# EAGLE board 13255-SparkFun_Cypress_USBUART_BOB-panel.v10 (EAGLE 7.5.0), part 1 of 6
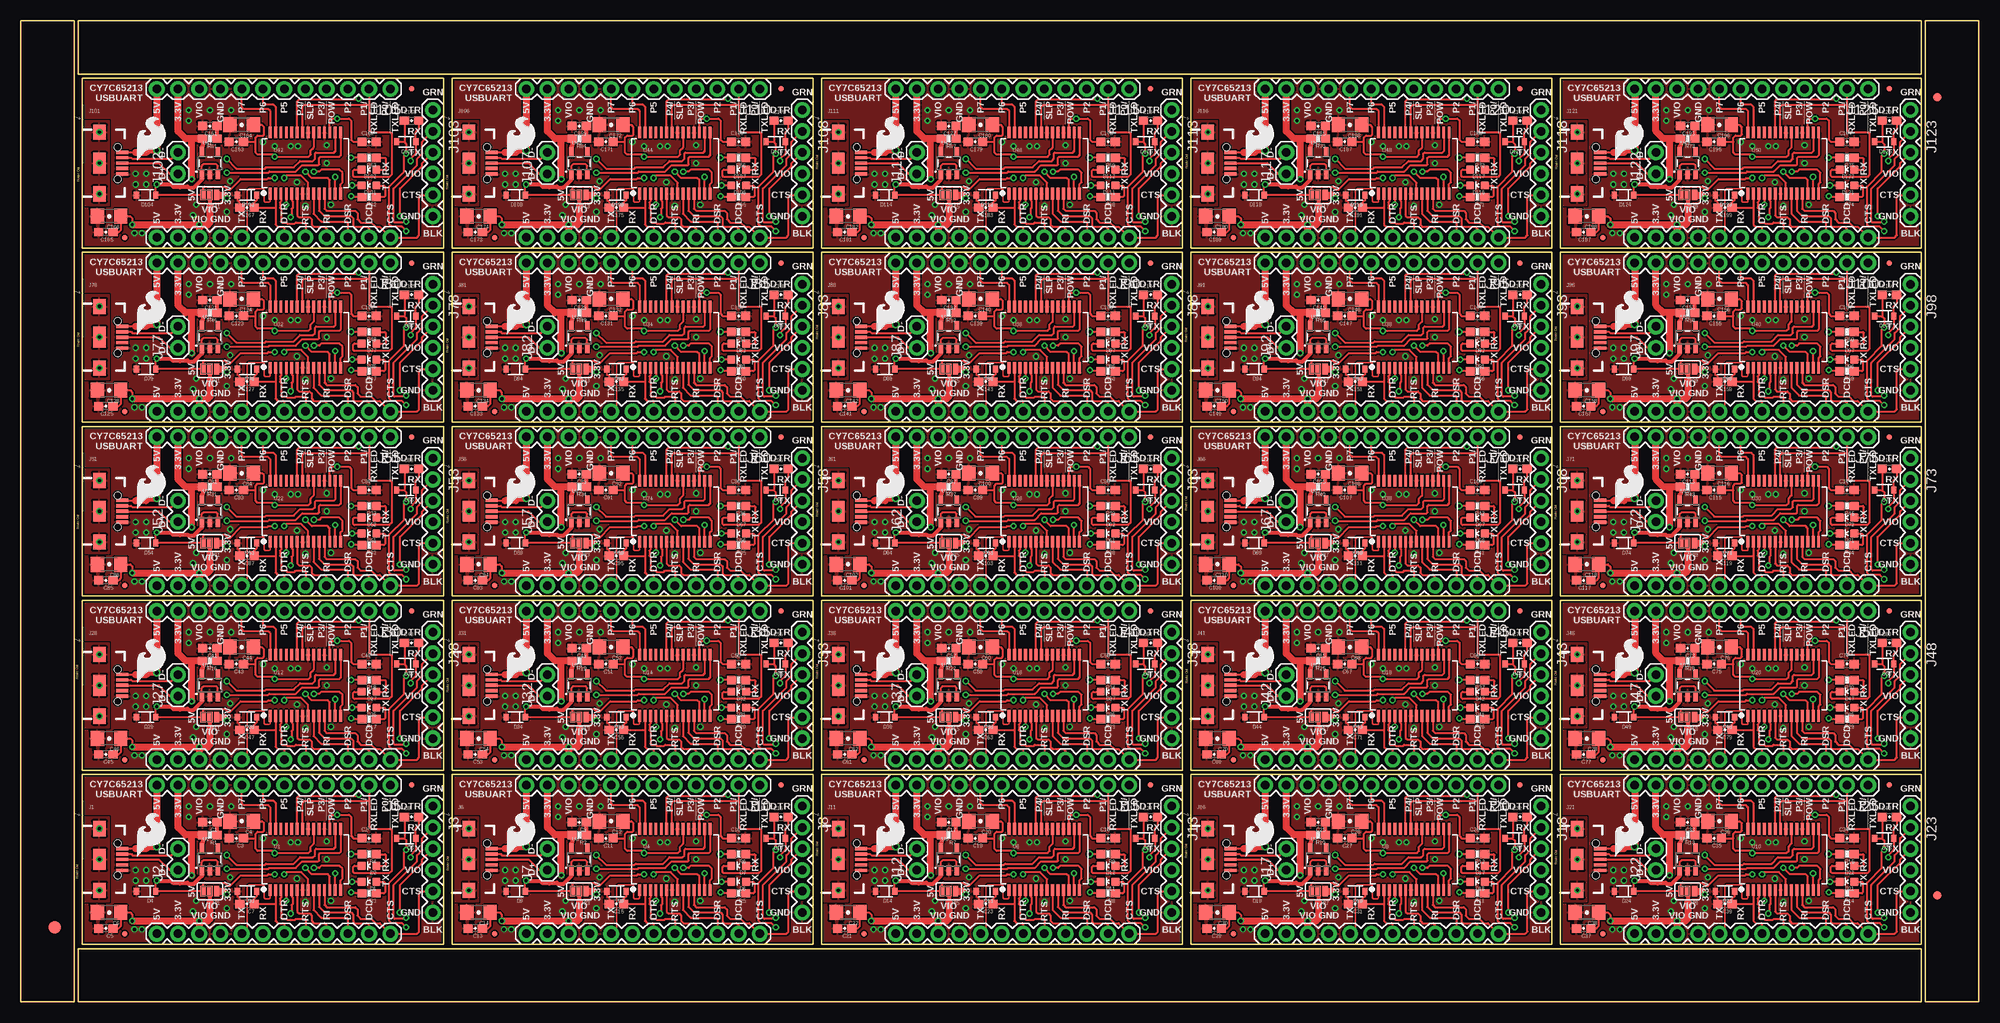
[diagram p0: board, top side]
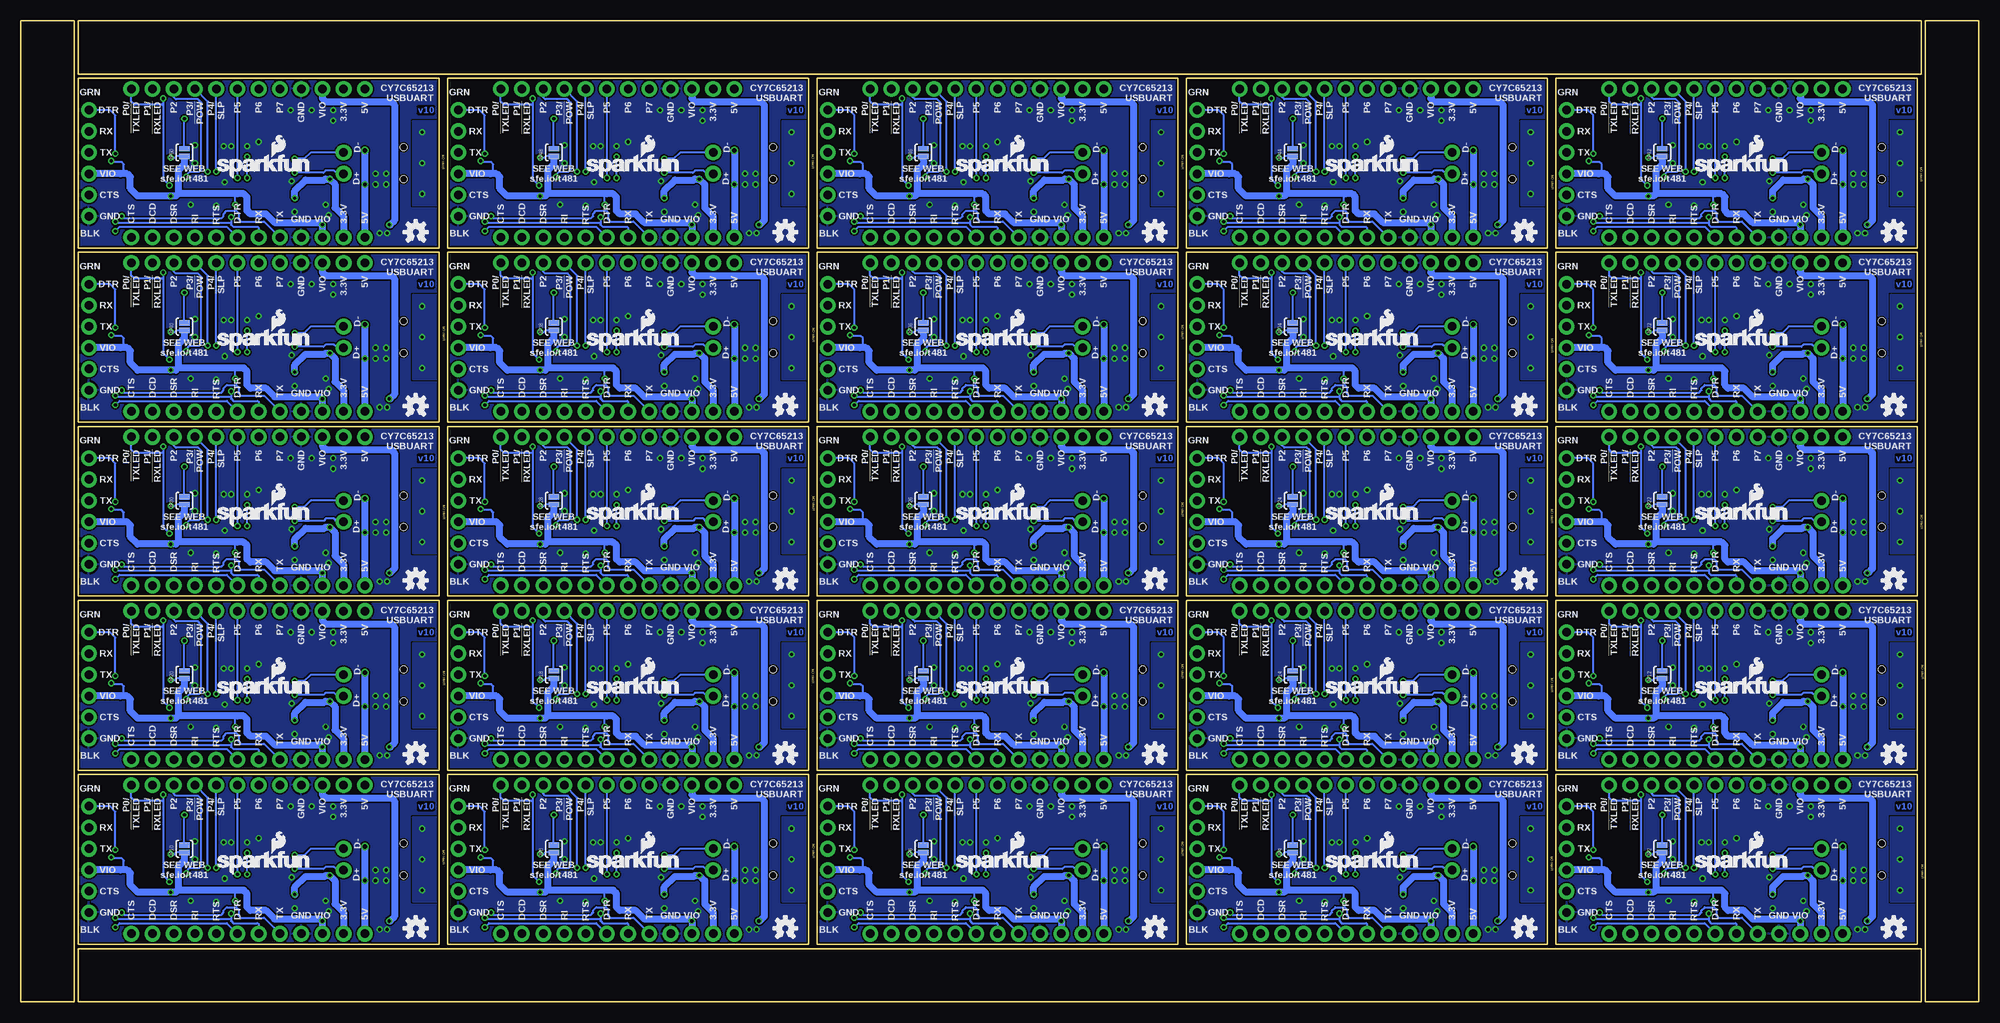
[diagram p1: board, bottom side, seen from below]

Size 234.19 x 117.35 mm. Coordinates in mm from the lower left corner, seen from the top.
Outline: 6.35,79.25 6.35,0 0,0 0,29.72
Outline: 0,27.18 0,117.35 6.35,117.35 6.35,76.71
Outline: 79.25,0 6.86,0 6.86,6.35 29.72,6.35
Outline: 27.18,6.35 227.33,6.35 227.33,0 76.71,0
Outline: 154.94,117.35 227.33,117.35 227.33,111 204.47,111
Outline: 207.01,111 6.86,111 6.86,117.35 157.48,117.35
Outline: 227.84,38.1 227.84,117.35 234.19,117.35 234.19,87.63
Outline: 234.19,90.17 234.19,0 227.84,0 227.84,40.64
Outline: 7.37,6.86 7.37,27.18 50.55,27.18 50.55,6.86 7.37,6.86
Outline: 51.56,6.86 51.56,27.18 94.74,27.18 94.74,6.86 51.56,6.86
Outline: 95.76,6.86 95.76,27.18 138.94,27.18 138.94,6.86 95.76,6.86
Outline: 139.95,6.86 139.95,27.18 183.13,27.18 183.13,6.86 139.95,6.86
Outline: 184.15,6.86 184.15,27.18 227.33,27.18 227.33,6.86 184.15,6.86
Outline: 7.37,27.69 7.37,48.01 50.55,48.01 50.55,27.69 7.37,27.69
Outline: 51.56,27.69 51.56,48.01 94.74,48.01 94.74,27.69 51.56,27.69
Outline: 95.76,27.69 95.76,48.01 138.94,48.01 138.94,27.69 95.76,27.69
Outline: 139.95,27.69 139.95,48.01 183.13,48.01 183.13,27.69 139.95,27.69
Outline: 184.15,27.69 184.15,48.01 227.33,48.01 227.33,27.69 184.15,27.69
Outline: 7.37,48.51 7.37,68.83 50.55,68.83 50.55,48.51 7.37,48.51
Outline: 51.56,48.51 51.56,68.83 94.74,68.83 94.74,48.51 51.56,48.51
Outline: 95.76,48.51 95.76,68.83 138.94,68.83 138.94,48.51 95.76,48.51
Outline: 139.95,48.51 139.95,68.83 183.13,68.83 183.13,48.51 139.95,48.51
Outline: 184.15,48.51 184.15,68.83 227.33,68.83 227.33,48.51 184.15,48.51
Outline: 7.37,69.34 7.37,89.66 50.55,89.66 50.55,69.34 7.37,69.34
Outline: 51.56,69.34 51.56,89.66 94.74,89.66 94.74,69.34 51.56,69.34
Outline: 95.76,69.34 95.76,89.66 138.94,89.66 138.94,69.34 95.76,69.34
Outline: 139.95,69.34 139.95,89.66 183.13,89.66 183.13,69.34 139.95,69.34
Outline: 184.15,69.34 184.15,89.66 227.33,89.66 227.33,69.34 184.15,69.34
Outline: 7.37,90.17 7.37,110.49 50.55,110.49 50.55,90.17 7.37,90.17
Outline: 51.56,90.17 51.56,110.49 94.74,110.49 94.74,90.17 51.56,90.17
Outline: 95.76,90.17 95.76,110.49 138.94,110.49 138.94,90.17 95.76,90.17
Outline: 139.95,90.17 139.95,110.49 183.13,110.49 183.13,90.17 139.95,90.17
Outline: 184.15,90.17 184.15,110.49 227.33,110.49 227.33,90.17 184.15,90.17
Copper layers (1*16): Top 0.035mm / dielectric 1.5mm / Bottom 0.035mm
Design rules "SparkFun-2-layer-TIGHT": minimum track width 7mil, minimum drill 15mil, track to track 7mil, track to pad 7mil, pad to pad 7mil, via to via 7mil, smd to smd 7mil, copper to edge 7mil, drill to drill 7mil, minimum pad ring 7mil, minimum via ring 7mil, stop-mask expansion 4mil, vias tented up to drill 20mil, thermal gap 10mil

## Footprints (pad centres in the part's own frame; a part is rotated, then mirrored left to right if it is on the bottom)
0603-CAP = smd 1.1 x 1: 1 -0.85,0; 2 0.85,0
1206-CAP = smd 1.6 x 1.8: 1 -1.4,0; 2 1.4,0
LED-0603 = smd 1 x 1: A 0,-0.877; C 0,0.877
SOD-323 = smd 0.63 x 0.83: A 1.15,0; C -1.15,0
FIDUCIAL-1.5X3 = smd 1.5 x 1.5: 1 0,0
FIDUCIAL-1X2 = smd 1 x 1: 1 0,0
MICRO-FIDUCIAL = smd 0.635 x 0.635: 1 0,0
USB-B-MICRO-SMD_V03 = smd 1.45 x 0.4: D+1 2.725,0; D-1 2.725,0.65; GND1 2.725,-1.3; ID1 2.725,-0.65; VBUS1 2.725,1.3 | smd 1.5 x 1.8: SHIELD1 0,3.685; SHIELD2 0,-3.685 | smd 1.5 x 2.5: SHIELD3 0,0 | hole 0.85: 2.2,1.9; 2.2,-1.9
1X02 = drill 1.016 pad 1.88: 1 0,0; 2 2.54,0
FTDI_BASIC = drill 1.016 pad 1.88: CTS 10.16,0; DTR 0,0; GND 12.7,0; RXI 2.54,0; TXO 5.08,0; VCC 7.62,0
1X12 = drill 1.016 pad 1.88: 1 0,0; 2 2.54,0; 3 5.08,0; 4 7.62,0; 5 10.16,0; 6 12.7,0; 7 15.24,0; 8 17.78,0; 9 20.32,0; 10 22.86,0; 11 25.4,0; 12 27.94,0
PAD-JUMPER-3-2OF3_NC_BY_PASTE_YES_SILK_FULL_BOX = smd 0.635 x 1.27: 1 -0.813,0; 2 0,0; 3 0.813,0
PAD-JUMPER-2-NO_YES_SILK = smd 0.635 x 1.27: 1 -0.45,0; 2 0.45,0
0603-RES = smd 1.1 x 1: 1 -0.85,0; 2 0.85,0
SSOP28DB = smd 0.348 x 1.397: 1 -4.225,-3.656; 2 -3.575,-3.656; 3 -2.925,-3.656; 4 -2.275,-3.656; 5 -1.625,-3.656; 6 -0.975,-3.656; 7 -0.325,-3.656; 8 0.325,-3.656; 9 0.975,-3.656; 10 1.625,-3.656; 11 2.275,-3.656; 12 2.925,-3.656; 13 3.575,-3.656; 14 4.225,-3.656; 15 4.225,3.656; 16 3.575,3.656; 17 2.925,3.656; 18 2.275,3.656; 19 1.625,3.656; 20 0.975,3.656; 21 0.325,3.656; 22 -0.325,3.656; 23 -0.975,3.656; 24 -1.625,3.656; 25 -2.275,3.656; 26 -2.925,3.656; 27 -3.575,3.656; 28 -4.225,3.656
SOT23-5 = smd 0.55 x 1.2: 1 -0.95,-1.3; 2 0,-1.3; 3 0.95,-1.3; 4 0.95,1.3; 5 -0.95,1.3

## Placement (x,y rotation side)
C1  2.2uF  [0603-CAP]  22.61,21.46 180 top
C2  1.0uF  [0603-CAP]  41.66,19.56 0 top
C3  0.1uF  [0603-CAP]  25.78,19.56 180 top
C4  4.7uF  [1206-CAP]  26.42,21.59 180 top
C5  0.1uF  [0603-CAP]  10.16,8.76 180 top
C6  4.7uF  [1206-CAP]  10.54,10.67 180 top
C7  10pF  [0603-CAP]  27.05,11.68 180 top
C8  10pF  [0603-CAP]  46.74,22.1 0 top
C9  2.2uF  [0603-CAP]  66.8,21.46 180 top
C10  1.0uF  [0603-CAP]  85.85,19.56 0 top
C11  0.1uF  [0603-CAP]  69.98,19.56 180 top
C12  4.7uF  [1206-CAP]  70.61,21.59 180 top
C13  0.1uF  [0603-CAP]  54.36,8.76 180 top
C14  4.7uF  [1206-CAP]  54.74,10.67 180 top
C15  10pF  [0603-CAP]  71.25,11.68 180 top
C16  10pF  [0603-CAP]  90.93,22.1 0 top
C17  2.2uF  [0603-CAP]  111,21.46 180 top
C18  1.0uF  [0603-CAP]  130.05,19.56 0 top
C19  0.1uF  [0603-CAP]  114.17,19.56 180 top
C20  4.7uF  [1206-CAP]  114.81,21.59 180 top
C21  0.1uF  [0603-CAP]  98.55,8.76 180 top
C22  4.7uF  [1206-CAP]  98.93,10.67 180 top
C23  10pF  [0603-CAP]  115.44,11.68 180 top
C24  10pF  [0603-CAP]  135.13,22.1 0 top
C25  2.2uF  [0603-CAP]  155.19,21.46 180 top
C26  1.0uF  [0603-CAP]  174.24,19.56 0 top
C27  0.1uF  [0603-CAP]  158.37,19.56 180 top
C28  4.7uF  [1206-CAP]  159,21.59 180 top
C29  0.1uF  [0603-CAP]  142.75,8.76 180 top
C30  4.7uF  [1206-CAP]  143.13,10.67 180 top
C31  10pF  [0603-CAP]  159.64,11.68 180 top
C32  10pF  [0603-CAP]  179.32,22.1 0 top
C33  2.2uF  [0603-CAP]  199.39,21.46 180 top
C34  1.0uF  [0603-CAP]  218.44,19.56 0 top
C35  0.1uF  [0603-CAP]  202.56,19.56 180 top
C36  4.7uF  [1206-CAP]  203.2,21.59 180 top
C37  0.1uF  [0603-CAP]  186.94,8.76 180 top
C38  4.7uF  [1206-CAP]  187.32,10.67 180 top
C39  10pF  [0603-CAP]  203.84,11.68 180 top
C40  10pF  [0603-CAP]  223.52,22.1 0 top
C41  2.2uF  [0603-CAP]  22.61,42.29 180 top
C42  1.0uF  [0603-CAP]  41.66,40.39 0 top
C43  0.1uF  [0603-CAP]  25.78,40.39 180 top
C44  4.7uF  [1206-CAP]  26.42,42.42 180 top
C45  0.1uF  [0603-CAP]  10.16,29.59 180 top
C46  4.7uF  [1206-CAP]  10.54,31.5 180 top
C47  10pF  [0603-CAP]  27.05,32.51 180 top
C48  10pF  [0603-CAP]  46.74,42.93 0 top
C49  2.2uF  [0603-CAP]  66.8,42.29 180 top
C50  1.0uF  [0603-CAP]  85.85,40.39 0 top
C51  0.1uF  [0603-CAP]  69.98,40.39 180 top
C52  4.7uF  [1206-CAP]  70.61,42.42 180 top
C53  0.1uF  [0603-CAP]  54.36,29.59 180 top
C54  4.7uF  [1206-CAP]  54.74,31.5 180 top
C55  10pF  [0603-CAP]  71.25,32.51 180 top
C56  10pF  [0603-CAP]  90.93,42.93 0 top
C57  2.2uF  [0603-CAP]  111,42.29 180 top
C58  1.0uF  [0603-CAP]  130.05,40.39 0 top
C59  0.1uF  [0603-CAP]  114.17,40.39 180 top
C60  4.7uF  [1206-CAP]  114.81,42.42 180 top
C61  0.1uF  [0603-CAP]  98.55,29.59 180 top
C62  4.7uF  [1206-CAP]  98.93,31.5 180 top
C63  10pF  [0603-CAP]  115.44,32.51 180 top
C64  10pF  [0603-CAP]  135.13,42.93 0 top
C65  2.2uF  [0603-CAP]  155.19,42.29 180 top
C66  1.0uF  [0603-CAP]  174.24,40.39 0 top
C67  0.1uF  [0603-CAP]  158.37,40.39 180 top
C68  4.7uF  [1206-CAP]  159,42.42 180 top
C69  0.1uF  [0603-CAP]  142.75,29.59 180 top
C70  4.7uF  [1206-CAP]  143.13,31.5 180 top
C71  10pF  [0603-CAP]  159.64,32.51 180 top
C72  10pF  [0603-CAP]  179.32,42.93 0 top
C73  2.2uF  [0603-CAP]  199.39,42.29 180 top
C74  1.0uF  [0603-CAP]  218.44,40.39 0 top
C75  0.1uF  [0603-CAP]  202.56,40.39 180 top
C76  4.7uF  [1206-CAP]  203.2,42.42 180 top
C77  0.1uF  [0603-CAP]  186.94,29.59 180 top
C78  4.7uF  [1206-CAP]  187.32,31.5 180 top
C79  10pF  [0603-CAP]  203.84,32.51 180 top
C80  10pF  [0603-CAP]  223.52,42.93 0 top
C81  2.2uF  [0603-CAP]  22.61,63.12 180 top
C82  1.0uF  [0603-CAP]  41.66,61.21 0 top
C83  0.1uF  [0603-CAP]  25.78,61.21 180 top
C84  4.7uF  [1206-CAP]  26.42,63.25 180 top
C85  0.1uF  [0603-CAP]  10.16,50.42 180 top
C86  4.7uF  [1206-CAP]  10.54,52.32 180 top
C87  10pF  [0603-CAP]  27.05,53.34 180 top
C88  10pF  [0603-CAP]  46.74,63.75 0 top
C89  2.2uF  [0603-CAP]  66.8,63.12 180 top
C90  1.0uF  [0603-CAP]  85.85,61.21 0 top
C91  0.1uF  [0603-CAP]  69.98,61.21 180 top
C92  4.7uF  [1206-CAP]  70.61,63.25 180 top
C93  0.1uF  [0603-CAP]  54.36,50.42 180 top
C94  4.7uF  [1206-CAP]  54.74,52.32 180 top
C95  10pF  [0603-CAP]  71.25,53.34 180 top
C96  10pF  [0603-CAP]  90.93,63.75 0 top
C97  2.2uF  [0603-CAP]  111,63.12 180 top
C98  1.0uF  [0603-CAP]  130.05,61.21 0 top
C99  0.1uF  [0603-CAP]  114.17,61.21 180 top
C100  4.7uF  [1206-CAP]  114.81,63.25 180 top
C101  0.1uF  [0603-CAP]  98.55,50.42 180 top
C102  4.7uF  [1206-CAP]  98.93,52.32 180 top
C103  10pF  [0603-CAP]  115.44,53.34 180 top
C104  10pF  [0603-CAP]  135.13,63.75 0 top
C105  2.2uF  [0603-CAP]  155.19,63.12 180 top
C106  1.0uF  [0603-CAP]  174.24,61.21 0 top
C107  0.1uF  [0603-CAP]  158.37,61.21 180 top
C108  4.7uF  [1206-CAP]  159,63.25 180 top
C109  0.1uF  [0603-CAP]  142.75,50.42 180 top
C110  4.7uF  [1206-CAP]  143.13,52.32 180 top
C111  10pF  [0603-CAP]  159.64,53.34 180 top
C112  10pF  [0603-CAP]  179.32,63.75 0 top
C113  2.2uF  [0603-CAP]  199.39,63.12 180 top
C114  1.0uF  [0603-CAP]  218.44,61.21 0 top
C115  0.1uF  [0603-CAP]  202.56,61.21 180 top
C116  4.7uF  [1206-CAP]  203.2,63.25 180 top
C117  0.1uF  [0603-CAP]  186.94,50.42 180 top
C118  4.7uF  [1206-CAP]  187.32,52.32 180 top
C119  10pF  [0603-CAP]  203.84,53.34 180 top
C120  10pF  [0603-CAP]  223.52,63.75 0 top
C121  2.2uF  [0603-CAP]  22.61,83.95 180 top
C122  1.0uF  [0603-CAP]  41.66,82.04 0 top
C123  0.1uF  [0603-CAP]  25.78,82.04 180 top
C124  4.7uF  [1206-CAP]  26.42,84.07 180 top
C125  0.1uF  [0603-CAP]  10.16,71.25 180 top
C126  4.7uF  [1206-CAP]  10.54,73.15 180 top
C127  10pF  [0603-CAP]  27.05,74.17 180 top
C128  10pF  [0603-CAP]  46.74,84.58 0 top
C129  2.2uF  [0603-CAP]  66.8,83.95 180 top
C130  1.0uF  [0603-CAP]  85.85,82.04 0 top
C131  0.1uF  [0603-CAP]  69.98,82.04 180 top
C132  4.7uF  [1206-CAP]  70.61,84.07 180 top
C133  0.1uF  [0603-CAP]  54.36,71.25 180 top
C134  4.7uF  [1206-CAP]  54.74,73.15 180 top
C135  10pF  [0603-CAP]  71.25,74.17 180 top
C136  10pF  [0603-CAP]  90.93,84.58 0 top
C137  2.2uF  [0603-CAP]  111,83.95 180 top
C138  1.0uF  [0603-CAP]  130.05,82.04 0 top
C139  0.1uF  [0603-CAP]  114.17,82.04 180 top
C140  4.7uF  [1206-CAP]  114.81,84.07 180 top
C141  0.1uF  [0603-CAP]  98.55,71.25 180 top
C142  4.7uF  [1206-CAP]  98.93,73.15 180 top
C143  10pF  [0603-CAP]  115.44,74.17 180 top
C144  10pF  [0603-CAP]  135.13,84.58 0 top
C145  2.2uF  [0603-CAP]  155.19,83.95 180 top
C146  1.0uF  [0603-CAP]  174.24,82.04 0 top
C147  0.1uF  [0603-CAP]  158.37,82.04 180 top
C148  4.7uF  [1206-CAP]  159,84.07 180 top
C149  0.1uF  [0603-CAP]  142.75,71.25 180 top
C150  4.7uF  [1206-CAP]  143.13,73.15 180 top
C151  10pF  [0603-CAP]  159.64,74.17 180 top
C152  10pF  [0603-CAP]  179.32,84.58 0 top
C153  2.2uF  [0603-CAP]  199.39,83.95 180 top
C154  1.0uF  [0603-CAP]  218.44,82.04 0 top
C155  0.1uF  [0603-CAP]  202.56,82.04 180 top
C156  4.7uF  [1206-CAP]  203.2,84.07 180 top
C157  0.1uF  [0603-CAP]  186.94,71.25 180 top
C158  4.7uF  [1206-CAP]  187.32,73.15 180 top
C159  10pF  [0603-CAP]  203.84,74.17 180 top
C160  10pF  [0603-CAP]  223.52,84.58 0 top
C161  2.2uF  [0603-CAP]  22.61,104.78 180 top
C162  1.0uF  [0603-CAP]  41.66,102.87 0 top
C163  0.1uF  [0603-CAP]  25.78,102.87 180 top
C164  4.7uF  [1206-CAP]  26.42,104.9 180 top
C165  0.1uF  [0603-CAP]  10.16,92.08 180 top
C166  4.7uF  [1206-CAP]  10.54,93.98 180 top
C167  10pF  [0603-CAP]  27.05,95 180 top
C168  10pF  [0603-CAP]  46.74,105.41 0 top
C169  2.2uF  [0603-CAP]  66.8,104.78 180 top
C170  1.0uF  [0603-CAP]  85.85,102.87 0 top
C171  0.1uF  [0603-CAP]  69.98,102.87 180 top
C172  4.7uF  [1206-CAP]  70.61,104.9 180 top
C173  0.1uF  [0603-CAP]  54.36,92.08 180 top
C174  4.7uF  [1206-CAP]  54.74,93.98 180 top
C175  10pF  [0603-CAP]  71.25,95 180 top
C176  10pF  [0603-CAP]  90.93,105.41 0 top
C177  2.2uF  [0603-CAP]  111,104.78 180 top
C178  1.0uF  [0603-CAP]  130.05,102.87 0 top
C179  0.1uF  [0603-CAP]  114.17,102.87 180 top
C180  4.7uF  [1206-CAP]  114.81,104.9 180 top
C181  0.1uF  [0603-CAP]  98.55,92.08 180 top
C182  4.7uF  [1206-CAP]  98.93,93.98 180 top
C183  10pF  [0603-CAP]  115.44,95 180 top
C184  10pF  [0603-CAP]  135.13,105.41 0 top
C185  2.2uF  [0603-CAP]  155.19,104.78 180 top
C186  1.0uF  [0603-CAP]  174.24,102.87 0 top
C187  0.1uF  [0603-CAP]  158.37,102.87 180 top
C188  4.7uF  [1206-CAP]  159,104.9 180 top
C189  0.1uF  [0603-CAP]  142.75,92.08 180 top
C190  4.7uF  [1206-CAP]  143.13,93.98 180 top
C191  10pF  [0603-CAP]  159.64,95 180 top
C192  10pF  [0603-CAP]  179.32,105.41 0 top
C193  2.2uF  [0603-CAP]  199.39,104.78 180 top
C194  1.0uF  [0603-CAP]  218.44,102.87 0 top
C195  0.1uF  [0603-CAP]  202.56,102.87 180 top
C196  4.7uF  [1206-CAP]  203.2,104.9 180 top
C197  0.1uF  [0603-CAP]  186.94,92.08 180 top
C198  4.7uF  [1206-CAP]  187.32,93.98 180 top
C199  10pF  [0603-CAP]  203.84,95 180 top
C200  10pF  [0603-CAP]  223.52,105.41 0 top
D1  RED  [LED-0603]  41.66,14.35 90 top
D2  GREEN  [LED-0603]  41.66,16.26 90 top
D3  PMEG4005EJ  [SOD-323]  27.05,13.21 180 top
D4  5.6V  [SOD-323]  14.99,13.21 180 top
D5  PMEG4005EJ  [SOD-323]  46.1,19.56 180 top
D6  RED  [LED-0603]  85.85,14.35 90 top
D7  GREEN  [LED-0603]  85.85,16.26 90 top
D8  PMEG4005EJ  [SOD-323]  71.25,13.21 180 top
D9  5.6V  [SOD-323]  59.18,13.21 180 top
D10  PMEG4005EJ  [SOD-323]  90.3,19.56 180 top
D11  RED  [LED-0603]  130.05,14.35 90 top
D12  GREEN  [LED-0603]  130.05,16.26 90 top
D13  PMEG4005EJ  [SOD-323]  115.44,13.21 180 top
D14  5.6V  [SOD-323]  103.38,13.21 180 top
D15  PMEG4005EJ  [SOD-323]  134.49,19.56 180 top
D16  RED  [LED-0603]  174.24,14.35 90 top
D17  GREEN  [LED-0603]  174.24,16.26 90 top
D18  PMEG4005EJ  [SOD-323]  159.64,13.21 180 top
D19  5.6V  [SOD-323]  147.57,13.21 180 top
D20  PMEG4005EJ  [SOD-323]  178.69,19.56 180 top
D21  RED  [LED-0603]  218.44,14.35 90 top
D22  GREEN  [LED-0603]  218.44,16.26 90 top
D23  PMEG4005EJ  [SOD-323]  203.84,13.21 180 top
D24  5.6V  [SOD-323]  191.77,13.21 180 top
D25  PMEG4005EJ  [SOD-323]  222.88,19.56 180 top
D26  RED  [LED-0603]  41.66,35.18 90 top
D27  GREEN  [LED-0603]  41.66,37.08 90 top
D28  PMEG4005EJ  [SOD-323]  27.05,34.04 180 top
D29  5.6V  [SOD-323]  14.99,34.04 180 top
D30  PMEG4005EJ  [SOD-323]  46.1,40.39 180 top
D31  RED  [LED-0603]  85.85,35.18 90 top
D32  GREEN  [LED-0603]  85.85,37.08 90 top
D33  PMEG4005EJ  [SOD-323]  71.25,34.04 180 top
D34  5.6V  [SOD-323]  59.18,34.04 180 top
D35  PMEG4005EJ  [SOD-323]  90.3,40.39 180 top
D36  RED  [LED-0603]  130.05,35.18 90 top
D37  GREEN  [LED-0603]  130.05,37.08 90 top
D38  PMEG4005EJ  [SOD-323]  115.44,34.04 180 top
D39  5.6V  [SOD-323]  103.38,34.04 180 top
D40  PMEG4005EJ  [SOD-323]  134.49,40.39 180 top
D41  RED  [LED-0603]  174.24,35.18 90 top
D42  GREEN  [LED-0603]  174.24,37.08 90 top
D43  PMEG4005EJ  [SOD-323]  159.64,34.04 180 top
D44  5.6V  [SOD-323]  147.57,34.04 180 top
D45  PMEG4005EJ  [SOD-323]  178.69,40.39 180 top
D46  RED  [LED-0603]  218.44,35.18 90 top
D47  GREEN  [LED-0603]  218.44,37.08 90 top
D48  PMEG4005EJ  [SOD-323]  203.84,34.04 180 top
D49  5.6V  [SOD-323]  191.77,34.04 180 top
D50  PMEG4005EJ  [SOD-323]  222.88,40.39 180 top
D51  RED  [LED-0603]  41.66,56.01 90 top
D52  GREEN  [LED-0603]  41.66,57.91 90 top
D53  PMEG4005EJ  [SOD-323]  27.05,54.86 180 top
D54  5.6V  [SOD-323]  14.99,54.86 180 top
D55  PMEG4005EJ  [SOD-323]  46.1,61.21 180 top
D56  RED  [LED-0603]  85.85,56.01 90 top
D57  GREEN  [LED-0603]  85.85,57.91 90 top
D58  PMEG4005EJ  [SOD-323]  71.25,54.86 180 top
D59  5.6V  [SOD-323]  59.18,54.86 180 top
D60  PMEG4005EJ  [SOD-323]  90.3,61.21 180 top
D61  RED  [LED-0603]  130.05,56.01 90 top
D62  GREEN  [LED-0603]  130.05,57.91 90 top
D63  PMEG4005EJ  [SOD-323]  115.44,54.86 180 top
D64  5.6V  [SOD-323]  103.38,54.86 180 top
D65  PMEG4005EJ  [SOD-323]  134.49,61.21 180 top
D66  RED  [LED-0603]  174.24,56.01 90 top
D67  GREEN  [LED-0603]  174.24,57.91 90 top
D68  PMEG4005EJ  [SOD-323]  159.64,54.86 180 top
D69  5.6V  [SOD-323]  147.57,54.86 180 top
D70  PMEG4005EJ  [SOD-323]  178.69,61.21 180 top
D71  RED  [LED-0603]  218.44,56.01 90 top
D72  GREEN  [LED-0603]  218.44,57.91 90 top
D73  PMEG4005EJ  [SOD-323]  203.84,54.86 180 top
D74  5.6V  [SOD-323]  191.77,54.86 180 top
D75  PMEG4005EJ  [SOD-323]  222.88,61.21 180 top
D76  RED  [LED-0603]  41.66,76.83 90 top
D77  GREEN  [LED-0603]  41.66,78.74 90 top
D78  PMEG4005EJ  [SOD-323]  27.05,75.69 180 top
D79  5.6V  [SOD-323]  14.99,75.69 180 top
D80  PMEG4005EJ  [SOD-323]  46.1,82.04 180 top
D81  RED  [LED-0603]  85.85,76.83 90 top
D82  GREEN  [LED-0603]  85.85,78.74 90 top
D83  PMEG4005EJ  [SOD-323]  71.25,75.69 180 top
D84  5.6V  [SOD-323]  59.18,75.69 180 top
D85  PMEG4005EJ  [SOD-323]  90.3,82.04 180 top
D86  RED  [LED-0603]  130.05,76.83 90 top
D87  GREEN  [LED-0603]  130.05,78.74 90 top
D88  PMEG4005EJ  [SOD-323]  115.44,75.69 180 top
D89  5.6V  [SOD-323]  103.38,75.69 180 top
D90  PMEG4005EJ  [SOD-323]  134.49,82.04 180 top
D91  RED  [LED-0603]  174.24,76.83 90 top
D92  GREEN  [LED-0603]  174.24,78.74 90 top
D93  PMEG4005EJ  [SOD-323]  159.64,75.69 180 top
D94  5.6V  [SOD-323]  147.57,75.69 180 top
D95  PMEG4005EJ  [SOD-323]  178.69,82.04 180 top
D96  RED  [LED-0603]  218.44,76.83 90 top
D97  GREEN  [LED-0603]  218.44,78.74 90 top
D98  PMEG4005EJ  [SOD-323]  203.84,75.69 180 top
D99  5.6V  [SOD-323]  191.77,75.69 180 top
D100  PMEG4005EJ  [SOD-323]  222.88,82.04 180 top
D101  RED  [LED-0603]  41.66,97.66 90 top
D102  GREEN  [LED-0603]  41.66,99.57 90 top
D103  PMEG4005EJ  [SOD-323]  27.05,96.52 180 top
D104  5.6V  [SOD-323]  14.99,96.52 180 top
D105  PMEG4005EJ  [SOD-323]  46.1,102.87 180 top
D106  RED  [LED-0603]  85.85,97.66 90 top
D107  GREEN  [LED-0603]  85.85,99.57 90 top
D108  PMEG4005EJ  [SOD-323]  71.25,96.52 180 top
D109  5.6V  [SOD-323]  59.18,96.52 180 top
D110  PMEG4005EJ  [SOD-323]  90.3,102.87 180 top
D111  RED  [LED-0603]  130.05,97.66 90 top
D112  GREEN  [LED-0603]  130.05,99.57 90 top
D113  PMEG4005EJ  [SOD-323]  115.44,96.52 180 top
D114  5.6V  [SOD-323]  103.38,96.52 180 top
D115  PMEG4005EJ  [SOD-323]  134.49,102.87 180 top
D116  RED  [LED-0603]  174.24,97.66 90 top
D117  GREEN  [LED-0603]  174.24,99.57 90 top
D118  PMEG4005EJ  [SOD-323]  159.64,96.52 180 top
D119  5.6V  [SOD-323]  147.57,96.52 180 top
D120  PMEG4005EJ  [SOD-323]  178.69,102.87 180 top
D121  RED  [LED-0603]  218.44,97.66 90 top
D122  GREEN  [LED-0603]  218.44,99.57 90 top
D123  PMEG4005EJ  [SOD-323]  203.84,96.52 180 top
D124  5.6V  [SOD-323]  191.77,96.52 180 top
D125  PMEG4005EJ  [SOD-323]  222.88,102.87 180 top
E$1  [FIDUCIAL-1.5X3]  4.06,8.89 0 top
E$7  [FIDUCIAL-1X2]  229.24,108.2 180 top
E$8  [FIDUCIAL-1X2]  229.24,12.7 0 top
FD1  FIDUCIALUFIDUCIAL  [MICRO-FIDUCIAL]  12.45,8.13 0 top
FD2  FIDUCIALUFIDUCIAL  [MICRO-FIDUCIAL]  46.74,25.91 0 top
FD3  FIDUCIALUFIDUCIAL  [MICRO-FIDUCIAL]  56.64,8.13 0 top
FD4  FIDUCIALUFIDUCIAL  [MICRO-FIDUCIAL]  90.93,25.91 0 top
FD5  FIDUCIALUFIDUCIAL  [MICRO-FIDUCIAL]  100.84,8.13 0 top
FD6  FIDUCIALUFIDUCIAL  [MICRO-FIDUCIAL]  135.13,25.91 0 top
FD7  FIDUCIALUFIDUCIAL  [MICRO-FIDUCIAL]  145.03,8.13 0 top
FD8  FIDUCIALUFIDUCIAL  [MICRO-FIDUCIAL]  179.32,25.91 0 top
FD9  FIDUCIALUFIDUCIAL  [MICRO-FIDUCIAL]  189.23,8.13 0 top
FD10  FIDUCIALUFIDUCIAL  [MICRO-FIDUCIAL]  223.52,25.91 0 top
FD11  FIDUCIALUFIDUCIAL  [MICRO-FIDUCIAL]  12.45,28.96 0 top
FD12  FIDUCIALUFIDUCIAL  [MICRO-FIDUCIAL]  46.74,46.74 0 top
FD13  FIDUCIALUFIDUCIAL  [MICRO-FIDUCIAL]  56.64,28.96 0 top
FD14  FIDUCIALUFIDUCIAL  [MICRO-FIDUCIAL]  90.93,46.74 0 top
FD15  FIDUCIALUFIDUCIAL  [MICRO-FIDUCIAL]  100.84,28.96 0 top
FD16  FIDUCIALUFIDUCIAL  [MICRO-FIDUCIAL]  135.13,46.74 0 top
FD17  FIDUCIALUFIDUCIAL  [MICRO-FIDUCIAL]  145.03,28.96 0 top
FD18  FIDUCIALUFIDUCIAL  [MICRO-FIDUCIAL]  179.32,46.74 0 top
FD19  FIDUCIALUFIDUCIAL  [MICRO-FIDUCIAL]  189.23,28.96 0 top
FD20  FIDUCIALUFIDUCIAL  [MICRO-FIDUCIAL]  223.52,46.74 0 top
FD21  FIDUCIALUFIDUCIAL  [MICRO-FIDUCIAL]  12.45,49.78 0 top
FD22  FIDUCIALUFIDUCIAL  [MICRO-FIDUCIAL]  46.74,67.56 0 top
FD23  FIDUCIALUFIDUCIAL  [MICRO-FIDUCIAL]  56.64,49.78 0 top
FD24  FIDUCIALUFIDUCIAL  [MICRO-FIDUCIAL]  90.93,67.56 0 top
FD25  FIDUCIALUFIDUCIAL  [MICRO-FIDUCIAL]  100.84,49.78 0 top
FD26  FIDUCIALUFIDUCIAL  [MICRO-FIDUCIAL]  135.13,67.56 0 top
FD27  FIDUCIALUFIDUCIAL  [MICRO-FIDUCIAL]  145.03,49.78 0 top
FD28  FIDUCIALUFIDUCIAL  [MICRO-FIDUCIAL]  179.32,67.56 0 top
FD29  FIDUCIALUFIDUCIAL  [MICRO-FIDUCIAL]  189.23,49.78 0 top
FD30  FIDUCIALUFIDUCIAL  [MICRO-FIDUCIAL]  223.52,67.56 0 top
FD31  FIDUCIALUFIDUCIAL  [MICRO-FIDUCIAL]  12.45,70.61 0 top
FD32  FIDUCIALUFIDUCIAL  [MICRO-FIDUCIAL]  46.74,88.39 0 top
FD33  FIDUCIALUFIDUCIAL  [MICRO-FIDUCIAL]  56.64,70.61 0 top
FD34  FIDUCIALUFIDUCIAL  [MICRO-FIDUCIAL]  90.93,88.39 0 top
FD35  FIDUCIALUFIDUCIAL  [MICRO-FIDUCIAL]  100.84,70.61 0 top
FD36  FIDUCIALUFIDUCIAL  [MICRO-FIDUCIAL]  135.13,88.39 0 top
FD37  FIDUCIALUFIDUCIAL  [MICRO-FIDUCIAL]  145.03,70.61 0 top
FD38  FIDUCIALUFIDUCIAL  [MICRO-FIDUCIAL]  179.32,88.39 0 top
FD39  FIDUCIALUFIDUCIAL  [MICRO-FIDUCIAL]  189.23,70.61 0 top
FD40  FIDUCIALUFIDUCIAL  [MICRO-FIDUCIAL]  223.52,88.39 0 top
FD41  FIDUCIALUFIDUCIAL  [MICRO-FIDUCIAL]  12.45,91.44 0 top
FD42  FIDUCIALUFIDUCIAL  [MICRO-FIDUCIAL]  46.74,109.22 0 top
FD43  FIDUCIALUFIDUCIAL  [MICRO-FIDUCIAL]  56.64,91.44 0 top
FD44  FIDUCIALUFIDUCIAL  [MICRO-FIDUCIAL]  90.93,109.22 0 top
FD45  FIDUCIALUFIDUCIAL  [MICRO-FIDUCIAL]  100.84,91.44 0 top
FD46  FIDUCIALUFIDUCIAL  [MICRO-FIDUCIAL]  135.13,109.22 0 top
FD47  FIDUCIALUFIDUCIAL  [MICRO-FIDUCIAL]  145.03,91.44 0 top
FD48  FIDUCIALUFIDUCIAL  [MICRO-FIDUCIAL]  179.32,109.22 0 top
FD49  FIDUCIALUFIDUCIAL  [MICRO-FIDUCIAL]  189.23,91.44 0 top
FD50  FIDUCIALUFIDUCIAL  [MICRO-FIDUCIAL]  223.52,109.22 0 top
J1  MICROB  [USB-B-MICRO-SMD_V03]  9.4,17.02 0 top
J2  [1X02]  18.8,15.75 90 top
J3  FTDI_BASICPTH  [FTDI_BASIC]  49.28,23.37 270 top
J4  [1X12]  44.2,8.13 180 top
J5  [1X12]  44.2,25.91 180 top
J6  MICROB  [USB-B-MICRO-SMD_V03]  53.59,17.02 0 top
J7  [1X02]  62.99,15.75 90 top
J8  FTDI_BASICPTH  [FTDI_BASIC]  93.47,23.37 270 top
J9  [1X12]  88.39,8.13 180 top
J10  [1X12]  88.39,25.91 180 top
J11  MICROB  [USB-B-MICRO-SMD_V03]  97.79,17.02 0 top
J12  [1X02]  107.19,15.75 90 top
J13  FTDI_BASICPTH  [FTDI_BASIC]  137.67,23.37 270 top
J14  [1X12]  132.59,8.13 180 top
J15  [1X12]  132.59,25.91 180 top
J16  MICROB  [USB-B-MICRO-SMD_V03]  141.99,17.02 0 top
J17  [1X02]  151.38,15.75 90 top
J18  FTDI_BASICPTH  [FTDI_BASIC]  181.86,23.37 270 top
J19  [1X12]  176.78,8.13 180 top
J20  [1X12]  176.78,25.91 180 top
J21  MICROB  [USB-B-MICRO-SMD_V03]  186.18,17.02 0 top
J22  [1X02]  195.58,15.75 90 top
J23  FTDI_BASICPTH  [FTDI_BASIC]  226.06,23.37 270 top
J24  [1X12]  220.98,8.13 180 top
J25  [1X12]  220.98,25.91 180 top
J26  MICROB  [USB-B-MICRO-SMD_V03]  9.4,37.85 0 top
J27  [1X02]  18.8,36.58 90 top
J28  FTDI_BASICPTH  [FTDI_BASIC]  49.28,44.2 270 top
J29  [1X12]  44.2,28.96 180 top
J30  [1X12]  44.2,46.74 180 top
J31  MICROB  [USB-B-MICRO-SMD_V03]  53.59,37.85 0 top
J32  [1X02]  62.99,36.58 90 top
J33  FTDI_BASICPTH  [FTDI_BASIC]  93.47,44.2 270 top
J34  [1X12]  88.39,28.96 180 top
J35  [1X12]  88.39,46.74 180 top
J36  MICROB  [USB-B-MICRO-SMD_V03]  97.79,37.85 0 top
J37  [1X02]  107.19,36.58 90 top
J38  FTDI_BASICPTH  [FTDI_BASIC]  137.67,44.2 270 top
J39  [1X12]  132.59,28.96 180 top
J40  [1X12]  132.59,46.74 180 top
J41  MICROB  [USB-B-MICRO-SMD_V03]  141.99,37.85 0 top
J42  [1X02]  151.38,36.58 90 top
J43  FTDI_BASICPTH  [FTDI_BASIC]  181.86,44.2 270 top
J44  [1X12]  176.78,28.96 180 top
J45  [1X12]  176.78,46.74 180 top
J46  MICROB  [USB-B-MICRO-SMD_V03]  186.18,37.85 0 top
J47  [1X02]  195.58,36.58 90 top
J48  FTDI_BASICPTH  [FTDI_BASIC]  226.06,44.2 270 top
J49  [1X12]  220.98,28.96 180 top
J50  [1X12]  220.98,46.74 180 top
J51  MICROB  [USB-B-MICRO-SMD_V03]  9.4,58.67 0 top
J52  [1X02]  18.8,57.4 90 top
J53  FTDI_BASICPTH  [FTDI_BASIC]  49.28,65.02 270 top
J54  [1X12]  44.2,49.78 180 top
J55  [1X12]  44.2,67.56 180 top
J56  MICROB  [USB-B-MICRO-SMD_V03]  53.59,58.67 0 top
J57  [1X02]  62.99,57.4 90 top
J58  FTDI_BASICPTH  [FTDI_BASIC]  93.47,65.02 270 top
J59  [1X12]  88.39,49.78 180 top
J60  [1X12]  88.39,67.56 180 top
J61  MICROB  [USB-B-MICRO-SMD_V03]  97.79,58.67 0 top
J62  [1X02]  107.19,57.4 90 top
J63  FTDI_BASICPTH  [FTDI_BASIC]  137.67,65.02 270 top
J64  [1X12]  132.59,49.78 180 top
J65  [1X12]  132.59,67.56 180 top
J66  MICROB  [USB-B-MICRO-SMD_V03]  141.99,58.67 0 top
J67  [1X02]  151.38,57.4 90 top
J68  FTDI_BASICPTH  [FTDI_BASIC]  181.86,65.02 270 top
J69  [1X12]  176.78,49.78 180 top
J70  [1X12]  176.78,67.56 180 top
J71  MICROB  [USB-B-MICRO-SMD_V03]  186.18,58.67 0 top
J72  [1X02]  195.58,57.4 90 top
J73  FTDI_BASICPTH  [FTDI_BASIC]  226.06,65.02 270 top
J74  [1X12]  220.98,49.78 180 top
J75  [1X12]  220.98,67.56 180 top
J76  MICROB  [USB-B-MICRO-SMD_V03]  9.4,79.5 0 top
J77  [1X02]  18.8,78.23 90 top
J78  FTDI_BASICPTH  [FTDI_BASIC]  49.28,85.85 270 top
J79  [1X12]  44.2,70.61 180 top
J80  [1X12]  44.2,88.39 180 top
J81  MICROB  [USB-B-MICRO-SMD_V03]  53.59,79.5 0 top
J82  [1X02]  62.99,78.23 90 top
J83  FTDI_BASICPTH  [FTDI_BASIC]  93.47,85.85 270 top
J84  [1X12]  88.39,70.61 180 top
J85  [1X12]  88.39,88.39 180 top
J86  MICROB  [USB-B-MICRO-SMD_V03]  97.79,79.5 0 top
J87  [1X02]  107.19,78.23 90 top
J88  FTDI_BASICPTH  [FTDI_BASIC]  137.67,85.85 270 top
J89  [1X12]  132.59,70.61 180 top
J90  [1X12]  132.59,88.39 180 top
J91  MICROB  [USB-B-MICRO-SMD_V03]  141.99,79.5 0 top
J92  [1X02]  151.38,78.23 90 top
J93  FTDI_BASICPTH  [FTDI_BASIC]  181.86,85.85 270 top
J94  [1X12]  176.78,70.61 180 top
J95  [1X12]  176.78,88.39 180 top
J96  MICROB  [USB-B-MICRO-SMD_V03]  186.18,79.5 0 top
J97  [1X02]  195.58,78.23 90 top
J98  FTDI_BASICPTH  [FTDI_BASIC]  226.06,85.85 270 top
J99  [1X12]  220.98,70.61 180 top
J100  [1X12]  220.98,88.39 180 top
J101  MICROB  [USB-B-MICRO-SMD_V03]  9.4,100.33 0 top
J102  [1X02]  18.8,99.06 90 top
J103  FTDI_BASICPTH  [FTDI_BASIC]  49.28,106.68 270 top
J104  [1X12]  44.2,91.44 180 top
J105  [1X12]  44.2,109.22 180 top
J106  MICROB  [USB-B-MICRO-SMD_V03]  53.59,100.33 0 top
J107  [1X02]  62.99,99.06 90 top
J108  FTDI_BASICPTH  [FTDI_BASIC]  93.47,106.68 270 top
J109  [1X12]  88.39,91.44 180 top
J110  [1X12]  88.39,109.22 180 top
J111  MICROB  [USB-B-MICRO-SMD_V03]  97.79,100.33 0 top
J112  [1X02]  107.19,99.06 90 top
J113  FTDI_BASICPTH  [FTDI_BASIC]  137.67,106.68 270 top
J114  [1X12]  132.59,91.44 180 top
J115  [1X12]  132.59,109.22 180 top
J116  MICROB  [USB-B-MICRO-SMD_V03]  141.99,100.33 0 top
J117  [1X02]  151.38,99.06 90 top
J118  FTDI_BASICPTH  [FTDI_BASIC]  181.86,106.68 270 top
J119  [1X12]  176.78,91.44 180 top
J120  [1X12]  176.78,109.22 180 top
J121  MICROB  [USB-B-MICRO-SMD_V03]  186.18,100.33 0 top
J122  [1X02]  195.58,99.06 90 top
J123  FTDI_BASICPTH  [FTDI_BASIC]  226.06,106.68 270 top
J124  [1X12]  220.98,91.44 180 top
J125  [1X12]  220.98,109.22 180 top
JP1  JUMPER-PAD-3-2OF3_NC_BY_PASTE  [PAD-JUMPER-3-2OF3_NC_BY_PASTE_YES_SILK_FULL_BOX]  22.61,13.21 180 top
JP2  JUMPER-PAD-2-NOYES_SILK  [PAD-JUMPER-2-NO_YES_SILK]  37.85,18.29 90 bottom
JP3  JUMPER-PAD-3-2OF3_NC_BY_PASTE  [PAD-JUMPER-3-2OF3_NC_BY_PASTE_YES_SILK_FULL_BOX]  66.8,13.21 180 top
JP4  JUMPER-PAD-2-NOYES_SILK  [PAD-JUMPER-2-NO_YES_SILK]  82.04,18.29 90 bottom
JP5  JUMPER-PAD-3-2OF3_NC_BY_PASTE  [PAD-JUMPER-3-2OF3_NC_BY_PASTE_YES_SILK_FULL_BOX]  111,13.21 180 top
JP6  JUMPER-PAD-2-NOYES_SILK  [PAD-JUMPER-2-NO_YES_SILK]  126.24,18.29 90 bottom
JP7  JUMPER-PAD-3-2OF3_NC_BY_PASTE  [PAD-JUMPER-3-2OF3_NC_BY_PASTE_YES_SILK_FULL_BOX]  155.19,13.21 180 top
JP8  JUMPER-PAD-2-NOYES_SILK  [PAD-JUMPER-2-NO_YES_SILK]  170.43,18.29 90 bottom
JP9  JUMPER-PAD-3-2OF3_NC_BY_PASTE  [PAD-JUMPER-3-2OF3_NC_BY_PASTE_YES_SILK_FULL_BOX]  199.39,13.21 180 top
JP10  JUMPER-PAD-2-NOYES_SILK  [PAD-JUMPER-2-NO_YES_SILK]  214.63,18.29 90 bottom
JP11  JUMPER-PAD-3-2OF3_NC_BY_PASTE  [PAD-JUMPER-3-2OF3_NC_BY_PASTE_YES_SILK_FULL_BOX]  22.61,34.04 180 top
JP12  JUMPER-PAD-2-NOYES_SILK  [PAD-JUMPER-2-NO_YES_SILK]  37.85,39.12 90 bottom
JP13  JUMPER-PAD-3-2OF3_NC_BY_PASTE  [PAD-JUMPER-3-2OF3_NC_BY_PASTE_YES_SILK_FULL_BOX]  66.8,34.04 180 top
JP14  JUMPER-PAD-2-NOYES_SILK  [PAD-JUMPER-2-NO_YES_SILK]  82.04,39.12 90 bottom
JP15  JUMPER-PAD-3-2OF3_NC_BY_PASTE  [PAD-JUMPER-3-2OF3_NC_BY_PASTE_YES_SILK_FULL_BOX]  111,34.04 180 top
JP16  JUMPER-PAD-2-NOYES_SILK  [PAD-JUMPER-2-NO_YES_SILK]  126.24,39.12 90 bottom
JP17  JUMPER-PAD-3-2OF3_NC_BY_PASTE  [PAD-JUMPER-3-2OF3_NC_BY_PASTE_YES_SILK_FULL_BOX]  155.19,34.04 180 top
JP18  JUMPER-PAD-2-NOYES_SILK  [PAD-JUMPER-2-NO_YES_SILK]  170.43,39.12 90 bottom
JP19  JUMPER-PAD-3-2OF3_NC_BY_PASTE  [PAD-JUMPER-3-2OF3_NC_BY_PASTE_YES_SILK_FULL_BOX]  199.39,34.04 180 top
JP20  JUMPER-PAD-2-NOYES_SILK  [PAD-JUMPER-2-NO_YES_SILK]  214.63,39.12 90 bottom
JP21  JUMPER-PAD-3-2OF3_NC_BY_PASTE  [PAD-JUMPER-3-2OF3_NC_BY_PASTE_YES_SILK_FULL_BOX]  22.61,54.86 180 top
JP22  JUMPER-PAD-2-NOYES_SILK  [PAD-JUMPER-2-NO_YES_SILK]  37.85,59.94 90 bottom
JP23  JUMPER-PAD-3-2OF3_NC_BY_PASTE  [PAD-JUMPER-3-2OF3_NC_BY_PASTE_YES_SILK_FULL_BOX]  66.8,54.86 180 top
JP24  JUMPER-PAD-2-NOYES_SILK  [PAD-JUMPER-2-NO_YES_SILK]  82.04,59.94 90 bottom
JP25  JUMPER-PAD-3-2OF3_NC_BY_PASTE  [PAD-JUMPER-3-2OF3_NC_BY_PASTE_YES_SILK_FULL_BOX]  111,54.86 180 top
JP26  JUMPER-PAD-2-NOYES_SILK  [PAD-JUMPER-2-NO_YES_SILK]  126.24,59.94 90 bottom
JP27  JUMPER-PAD-3-2OF3_NC_BY_PASTE  [PAD-JUMPER-3-2OF3_NC_BY_PASTE_YES_SILK_FULL_BOX]  155.19,54.86 180 top
JP28  JUMPER-PAD-2-NOYES_SILK  [PAD-JUMPER-2-NO_YES_SILK]  170.43,59.94 90 bottom
JP29  JUMPER-PAD-3-2OF3_NC_BY_PASTE  [PAD-JUMPER-3-2OF3_NC_BY_PASTE_YES_SILK_FULL_BOX]  199.39,54.86 180 top
JP30  JUMPER-PAD-2-NOYES_SILK  [PAD-JUMPER-2-NO_YES_SILK]  214.63,59.94 90 bottom
JP31  JUMPER-PAD-3-2OF3_NC_BY_PASTE  [PAD-JUMPER-3-2OF3_NC_BY_PASTE_YES_SILK_FULL_BOX]  22.61,75.69 180 top
JP32  JUMPER-PAD-2-NOYES_SILK  [PAD-JUMPER-2-NO_YES_SILK]  37.85,80.77 90 bottom
JP33  JUMPER-PAD-3-2OF3_NC_BY_PASTE  [PAD-JUMPER-3-2OF3_NC_BY_PASTE_YES_SILK_FULL_BOX]  66.8,75.69 180 top
JP34  JUMPER-PAD-2-NOYES_SILK  [PAD-JUMPER-2-NO_YES_SILK]  82.04,80.77 90 bottom
JP35  JUMPER-PAD-3-2OF3_NC_BY_PASTE  [PAD-JUMPER-3-2OF3_NC_BY_PASTE_YES_SILK_FULL_BOX]  111,75.69 180 top
JP36  JUMPER-PAD-2-NOYES_SILK  [PAD-JUMPER-2-NO_YES_SILK]  126.24,80.77 90 bottom
JP37  JUMPER-PAD-3-2OF3_NC_BY_PASTE  [PAD-JUMPER-3-2OF3_NC_BY_PASTE_YES_SILK_FULL_BOX]  155.19,75.69 180 top
JP38  JUMPER-PAD-2-NOYES_SILK  [PAD-JUMPER-2-NO_YES_SILK]  170.43,80.77 90 bottom
JP39  JUMPER-PAD-3-2OF3_NC_BY_PASTE  [PAD-JUMPER-3-2OF3_NC_BY_PASTE_YES_SILK_FULL_BOX]  199.39,75.69 180 top
JP40  JUMPER-PAD-2-NOYES_SILK  [PAD-JUMPER-2-NO_YES_SILK]  214.63,80.77 90 bottom
JP41  JUMPER-PAD-3-2OF3_NC_BY_PASTE  [PAD-JUMPER-3-2OF3_NC_BY_PASTE_YES_SILK_FULL_BOX]  22.61,96.52 180 top
JP42  JUMPER-PAD-2-NOYES_SILK  [PAD-JUMPER-2-NO_YES_SILK]  37.85,101.6 90 bottom
JP43  JUMPER-PAD-3-2OF3_NC_BY_PASTE  [PAD-JUMPER-3-2OF3_NC_BY_PASTE_YES_SILK_FULL_BOX]  66.8,96.52 180 top
JP44  JUMPER-PAD-2-NOYES_SILK  [PAD-JUMPER-2-NO_YES_SILK]  82.04,101.6 90 bottom
JP45  JUMPER-PAD-3-2OF3_NC_BY_PASTE  [PAD-JUMPER-3-2OF3_NC_BY_PASTE_YES_SILK_FULL_BOX]  111,96.52 180 top
JP46  JUMPER-PAD-2-NOYES_SILK  [PAD-JUMPER-2-NO_YES_SILK]  126.24,101.6 90 bottom
JP47  JUMPER-PAD-3-2OF3_NC_BY_PASTE  [PAD-JUMPER-3-2OF3_NC_BY_PASTE_YES_SILK_FULL_BOX]  155.19,96.52 180 top
JP48  JUMPER-PAD-2-NOYES_SILK  [PAD-JUMPER-2-NO_YES_SILK]  170.43,101.6 90 bottom
JP49  JUMPER-PAD-3-2OF3_NC_BY_PASTE  [PAD-JUMPER-3-2OF3_NC_BY_PASTE_YES_SILK_FULL_BOX]  199.39,96.52 180 top
JP50  JUMPER-PAD-2-NOYES_SILK  [PAD-JUMPER-2-NO_YES_SILK]  214.63,101.6 90 bottom
LOGO1  SFE_LOGO_NAME_FLAME.1_INCH  [SFE_LOGO_NAME_FLAME_.1]  34.29,15.11 0 bottom
LOGO2  OSHW-LOGOS  [OSHW-LOGO-S]  10.16,8.76 0 bottom
LOGO3  SFE_LOGO_NAME_FLAME.1_INCH  [SFE_LOGO_NAME_FLAME_.1]  78.49,15.11 0 bottom
LOGO4  SFE_LOGO_FLAME.2_INCH  [SFE_LOGO_FLAME_.2]  57.78,17.14 0 top
LOGO5  SFE_LOGO_FLAME.2_INCH  [SFE_LOGO_FLAME_.2]  13.59,17.14 0 top
LOGO6  OSHW-LOGOS  [OSHW-LOGO-S]  54.36,8.76 0 bottom
LOGO7  SFE_LOGO_NAME_FLAME.1_INCH  [SFE_LOGO_NAME_FLAME_.1]  122.68,15.11 0 bottom
LOGO8  SFE_LOGO_FLAME.2_INCH  [SFE_LOGO_FLAME_.2]  101.98,17.14 0 top
LOGO9  OSHW-LOGOS  [OSHW-LOGO-S]  98.55,8.76 0 bottom
LOGO10  SFE_LOGO_NAME_FLAME.1_INCH  [SFE_LOGO_NAME_FLAME_.1]  166.88,15.11 0 bottom
LOGO11  SFE_LOGO_FLAME.2_INCH  [SFE_LOGO_FLAME_.2]  146.18,17.14 0 top
LOGO12  OSHW-LOGOS  [OSHW-LOGO-S]  142.75,8.76 0 bottom
LOGO13  SFE_LOGO_NAME_FLAME.1_INCH  [SFE_LOGO_NAME_FLAME_.1]  211.07,15.11 0 bottom
LOGO14  SFE_LOGO_FLAME.2_INCH  [SFE_LOGO_FLAME_.2]  190.37,17.14 0 top
LOGO15  OSHW-LOGOS  [OSHW-LOGO-S]  186.94,8.76 0 bottom
LOGO16  SFE_LOGO_NAME_FLAME.1_INCH  [SFE_LOGO_NAME_FLAME_.1]  34.29,35.94 0 bottom
LOGO17  SFE_LOGO_FLAME.2_INCH  [SFE_LOGO_FLAME_.2]  13.59,37.97 0 top
LOGO18  OSHW-LOGOS  [OSHW-LOGO-S]  10.16,29.59 0 bottom
LOGO19  SFE_LOGO_NAME_FLAME.1_INCH  [SFE_LOGO_NAME_FLAME_.1]  78.49,35.94 0 bottom
LOGO20  SFE_LOGO_FLAME.2_INCH  [SFE_LOGO_FLAME_.2]  57.78,37.97 0 top
LOGO21  OSHW-LOGOS  [OSHW-LOGO-S]  54.36,29.59 0 bottom
LOGO22  SFE_LOGO_NAME_FLAME.1_INCH  [SFE_LOGO_NAME_FLAME_.1]  122.68,35.94 0 bottom
LOGO23  SFE_LOGO_FLAME.2_INCH  [SFE_LOGO_FLAME_.2]  101.98,37.97 0 top
LOGO24  OSHW-LOGOS  [OSHW-LOGO-S]  98.55,29.59 0 bottom
LOGO25  SFE_LOGO_NAME_FLAME.1_INCH  [SFE_LOGO_NAME_FLAME_.1]  166.88,35.94 0 bottom
LOGO26  SFE_LOGO_FLAME.2_INCH  [SFE_LOGO_FLAME_.2]  146.18,37.97 0 top
LOGO27  OSHW-LOGOS  [OSHW-LOGO-S]  142.75,29.59 0 bottom
LOGO28  SFE_LOGO_NAME_FLAME.1_INCH  [SFE_LOGO_NAME_FLAME_.1]  211.07,35.94 0 bottom
LOGO29  SFE_LOGO_FLAME.2_INCH  [SFE_LOGO_FLAME_.2]  190.37,37.97 0 top
LOGO30  OSHW-LOGOS  [OSHW-LOGO-S]  186.94,29.59 0 bottom
LOGO31  SFE_LOGO_NAME_FLAME.1_INCH  [SFE_LOGO_NAME_FLAME_.1]  34.29,56.77 0 bottom
LOGO32  SFE_LOGO_FLAME.2_INCH  [SFE_LOGO_FLAME_.2]  13.59,58.8 0 top
LOGO33  OSHW-LOGOS  [OSHW-LOGO-S]  10.16,50.42 0 bottom
LOGO34  SFE_LOGO_NAME_FLAME.1_INCH  [SFE_LOGO_NAME_FLAME_.1]  78.49,56.77 0 bottom
LOGO35  SFE_LOGO_FLAME.2_INCH  [SFE_LOGO_FLAME_.2]  57.78,58.8 0 top
LOGO36  OSHW-LOGOS  [OSHW-LOGO-S]  54.36,50.42 0 bottom
LOGO37  SFE_LOGO_NAME_FLAME.1_INCH  [SFE_LOGO_NAME_FLAME_.1]  122.68,56.77 0 bottom
LOGO38  SFE_LOGO_FLAME.2_INCH  [SFE_LOGO_FLAME_.2]  101.98,58.8 0 top
LOGO39  OSHW-LOGOS  [OSHW-LOGO-S]  98.55,50.42 0 bottom
LOGO40  SFE_LOGO_NAME_FLAME.1_INCH  [SFE_LOGO_NAME_FLAME_.1]  166.88,56.77 0 bottom
LOGO41  SFE_LOGO_FLAME.2_INCH  [SFE_LOGO_FLAME_.2]  146.18,58.8 0 top
LOGO42  OSHW-LOGOS  [OSHW-LOGO-S]  142.75,50.42 0 bottom
LOGO43  SFE_LOGO_NAME_FLAME.1_INCH  [SFE_LOGO_NAME_FLAME_.1]  211.07,56.77 0 bottom
LOGO44  SFE_LOGO_FLAME.2_INCH  [SFE_LOGO_FLAME_.2]  190.37,58.8 0 top
LOGO45  OSHW-LOGOS  [OSHW-LOGO-S]  186.94,50.42 0 bottom
LOGO46  SFE_LOGO_NAME_FLAME.1_INCH  [SFE_LOGO_NAME_FLAME_.1]  34.29,77.6 0 bottom
LOGO47  SFE_LOGO_FLAME.2_INCH  [SFE_LOGO_FLAME_.2]  13.59,79.63 0 top
LOGO48  OSHW-LOGOS  [OSHW-LOGO-S]  10.16,71.25 0 bottom
LOGO49  SFE_LOGO_NAME_FLAME.1_INCH  [SFE_LOGO_NAME_FLAME_.1]  78.49,77.6 0 bottom
LOGO50  SFE_LOGO_FLAME.2_INCH  [SFE_LOGO_FLAME_.2]  57.78,79.63 0 top
LOGO51  OSHW-LOGOS  [OSHW-LOGO-S]  54.36,71.25 0 bottom
LOGO52  SFE_LOGO_NAME_FLAME.1_INCH  [SFE_LOGO_NAME_FLAME_.1]  122.68,77.6 0 bottom
LOGO53  SFE_LOGO_FLAME.2_INCH  [SFE_LOGO_FLAME_.2]  101.98,79.63 0 top
LOGO54  OSHW-LOGOS  [OSHW-LOGO-S]  98.55,71.25 0 bottom
LOGO55  SFE_LOGO_NAME_FLAME.1_INCH  [SFE_LOGO_NAME_FLAME_.1]  166.88,77.6 0 bottom
LOGO56  SFE_LOGO_FLAME.2_INCH  [SFE_LOGO_FLAME_.2]  146.18,79.63 0 top
LOGO57  OSHW-LOGOS  [OSHW-LOGO-S]  142.75,71.25 0 bottom
LOGO58  SFE_LOGO_NAME_FLAME.1_INCH  [SFE_LOGO_NAME_FLAME_.1]  211.07,77.6 0 bottom
LOGO59  SFE_LOGO_FLAME.2_INCH  [SFE_LOGO_FLAME_.2]  190.37,79.63 0 top
LOGO60  OSHW-LOGOS  [OSHW-LOGO-S]  186.94,71.25 0 bottom
LOGO61  SFE_LOGO_NAME_FLAME.1_INCH  [SFE_LOGO_NAME_FLAME_.1]  34.29,98.42 0 bottom
LOGO62  SFE_LOGO_FLAME.2_INCH  [SFE_LOGO_FLAME_.2]  13.59,100.46 0 top
LOGO63  OSHW-LOGOS  [OSHW-LOGO-S]  10.16,92.08 0 bottom
LOGO64  SFE_LOGO_NAME_FLAME.1_INCH  [SFE_LOGO_NAME_FLAME_.1]  78.49,98.42 0 bottom
LOGO65  SFE_LOGO_FLAME.2_INCH  [SFE_LOGO_FLAME_.2]  57.78,100.46 0 top
LOGO66  OSHW-LOGOS  [OSHW-LOGO-S]  54.36,92.08 0 bottom
LOGO67  SFE_LOGO_NAME_FLAME.1_INCH  [SFE_LOGO_NAME_FLAME_.1]  122.68,98.42 0 bottom
LOGO68  SFE_LOGO_FLAME.2_INCH  [SFE_LOGO_FLAME_.2]  101.98,100.46 0 top
LOGO69  OSHW-LOGOS  [OSHW-LOGO-S]  98.55,92.08 0 bottom
LOGO70  SFE_LOGO_NAME_FLAME.1_INCH  [SFE_LOGO_NAME_FLAME_.1]  166.88,98.42 0 bottom
LOGO71  SFE_LOGO_FLAME.2_INCH  [SFE_LOGO_FLAME_.2]  146.18,100.46 0 top
LOGO72  OSHW-LOGOS  [OSHW-LOGO-S]  142.75,92.08 0 bottom
LOGO73  SFE_LOGO_NAME_FLAME.1_INCH  [SFE_LOGO_NAME_FLAME_.1]  211.07,98.42 0 bottom
LOGO74  SFE_LOGO_FLAME.2_INCH  [SFE_LOGO_FLAME_.2]  190.37,100.46 0 top
LOGO75  OSHW-LOGOS  [OSHW-LOGO-S]  186.94,92.08 0 bottom
R1  0.27  [0603-RES]  22.61,19.94 180 top
R2  0.27  [0603-RES]  66.8,19.94 180 top
R3  1K  [0603-RES]  41.66,12.95 180 top
R4  1K  [0603-RES]  41.66,17.65 180 top
R5  1K  [0603-RES]  85.85,12.95 180 top
R6  1K  [0603-RES]  85.85,17.65 180 top
R7  0.27  [0603-RES]  111,19.94 180 top
R8  1K  [0603-RES]  130.05,12.95 180 top
R9  1K  [0603-RES]  130.05,17.65 180 top
R10  0.27  [0603-RES]  155.19,19.94 180 top
R11  1K  [0603-RES]  174.24,12.95 180 top
R12  1K  [0603-RES]  174.24,17.65 180 top
R13  0.27  [0603-RES]  199.39,19.94 180 top
R14  1K  [0603-RES]  218.44,12.95 180 top
R15  1K  [0603-RES]  218.44,17.65 180 top
R16  0.27  [0603-RES]  22.61,40.77 180 top
R17  1K  [0603-RES]  41.66,33.78 180 top
R18  1K  [0603-RES]  41.66,38.48 180 top
R19  0.27  [0603-RES]  66.8,40.77 180 top
R20  1K  [0603-RES]  85.85,33.78 180 top
R21  1K  [0603-RES]  85.85,38.48 180 top
R22  0.27  [0603-RES]  111,40.77 180 top
R23  1K  [0603-RES]  130.05,33.78 180 top
R24  1K  [0603-RES]  130.05,38.48 180 top
R25  0.27  [0603-RES]  155.19,40.77 180 top
R26  1K  [0603-RES]  174.24,33.78 180 top
R27  1K  [0603-RES]  174.24,38.48 180 top
R28  0.27  [0603-RES]  199.39,40.77 180 top
R29  1K  [0603-RES]  218.44,33.78 180 top
R30  1K  [0603-RES]  218.44,38.48 180 top
R31  0.27  [0603-RES]  22.61,61.59 180 top
R32  1K  [0603-RES]  41.66,54.61 180 top
R33  1K  [0603-RES]  41.66,59.31 180 top
R34  0.27  [0603-RES]  66.8,61.59 180 top
R35  1K  [0603-RES]  85.85,54.61 180 top
R36  1K  [0603-RES]  85.85,59.31 180 top
R37  0.27  [0603-RES]  111,61.59 180 top
R38  1K  [0603-RES]  130.05,54.61 180 top
R39  1K  [0603-RES]  130.05,59.31 180 top
R40  0.27  [0603-RES]  155.19,61.59 180 top
R41  1K  [0603-RES]  174.24,54.61 180 top
R42  1K  [0603-RES]  174.24,59.31 180 top
R43  0.27  [0603-RES]  199.39,61.59 180 top
R44  1K  [0603-RES]  218.44,54.61 180 top
R45  1K  [0603-RES]  218.44,59.31 180 top
R46  0.27  [0603-RES]  22.61,82.42 180 top
R47  1K  [0603-RES]  41.66,75.44 180 top
R48  1K  [0603-RES]  41.66,80.14 180 top
R49  0.27  [0603-RES]  66.8,82.42 180 top
R50  1K  [0603-RES]  85.85,75.44 180 top
R51  1K  [0603-RES]  85.85,80.14 180 top
R52  0.27  [0603-RES]  111,82.42 180 top
R53  1K  [0603-RES]  130.05,75.44 180 top
R54  1K  [0603-RES]  130.05,80.14 180 top
R55  0.27  [0603-RES]  155.19,82.42 180 top
R56  1K  [0603-RES]  174.24,75.44 180 top
R57  1K  [0603-RES]  174.24,80.14 180 top
R58  0.27  [0603-RES]  199.39,82.42 180 top
R59  1K  [0603-RES]  218.44,75.44 180 top
R60  1K  [0603-RES]  218.44,80.14 180 top
R61  0.27  [0603-RES]  22.61,103.25 180 top
R62  1K  [0603-RES]  41.66,96.27 180 top
R63  1K  [0603-RES]  41.66,100.97 180 top
R64  0.27  [0603-RES]  66.8,103.25 180 top
R65  1K  [0603-RES]  85.85,96.27 180 top
R66  1K  [0603-RES]  85.85,100.97 180 top
R67  0.27  [0603-RES]  111,103.25 180 top
R68  1K  [0603-RES]  130.05,96.27 180 top
R69  1K  [0603-RES]  130.05,100.97 180 top
R70  0.27  [0603-RES]  155.19,103.25 180 top
R71  1K  [0603-RES]  174.24,96.27 180 top
R72  1K  [0603-RES]  174.24,100.97 180 top
R73  0.27  [0603-RES]  199.39,103.25 180 top
R74  1K  [0603-RES]  218.44,96.27 180 top
R75  1K  [0603-RES]  218.44,100.97 180 top
U1  CY7C65213  [SSOP28DB]  34.04,17.02 0 top
U2  3.3V  [SOT23-5]  22.61,17.02 0 top
U3  3.3V  [SOT23-5]  66.8,17.02 0 top
U4  CY7C65213  [SSOP28DB]  78.23,17.02 0 top
U5  3.3V  [SOT23-5]  111,17.02 0 top
U6  CY7C65213  [SSOP28DB]  122.43,17.02 0 top
U7  3.3V  [SOT23-5]  155.19,17.02 0 top
U8  CY7C65213  [SSOP28DB]  166.62,17.02 0 top
U9  3.3V  [SOT23-5]  199.39,17.02 0 top
U10  CY7C65213  [SSOP28DB]  210.82,17.02 0 top
U11  3.3V  [SOT23-5]  22.61,37.85 0 top
U12  CY7C65213  [SSOP28DB]  34.04,37.85 0 top
U13  3.3V  [SOT23-5]  66.8,37.85 0 top
U14  CY7C65213  [SSOP28DB]  78.23,37.85 0 top
U15  3.3V  [SOT23-5]  111,37.85 0 top
U16  CY7C65213  [SSOP28DB]  122.43,37.85 0 top
U17  3.3V  [SOT23-5]  155.19,37.85 0 top
U18  CY7C65213  [SSOP28DB]  166.62,37.85 0 top
U19  3.3V  [SOT23-5]  199.39,37.85 0 top
U20  CY7C65213  [SSOP28DB]  210.82,37.85 0 top
U21  3.3V  [SOT23-5]  22.61,58.67 0 top
U22  CY7C65213  [SSOP28DB]  34.04,58.67 0 top
U23  3.3V  [SOT23-5]  66.8,58.67 0 top
U24  CY7C65213  [SSOP28DB]  78.23,58.67 0 top
U25  3.3V  [SOT23-5]  111,58.67 0 top
U26  CY7C65213  [SSOP28DB]  122.43,58.67 0 top
U27  3.3V  [SOT23-5]  155.19,58.67 0 top
U28  CY7C65213  [SSOP28DB]  166.62,58.67 0 top
U29  3.3V  [SOT23-5]  199.39,58.67 0 top
U30  CY7C65213  [SSOP28DB]  210.82,58.67 0 top
U31  3.3V  [SOT23-5]  22.61,79.5 0 top
U32  CY7C65213  [SSOP28DB]  34.04,79.5 0 top
U33  3.3V  [SOT23-5]  66.8,79.5 0 top
U34  CY7C65213  [SSOP28DB]  78.23,79.5 0 top
U35  3.3V  [SOT23-5]  111,79.5 0 top
U36  CY7C65213  [SSOP28DB]  122.43,79.5 0 top
U37  3.3V  [SOT23-5]  155.19,79.5 0 top
U38  CY7C65213  [SSOP28DB]  166.62,79.5 0 top
U39  3.3V  [SOT23-5]  199.39,79.5 0 top
U40  CY7C65213  [SSOP28DB]  210.82,79.5 0 top
U41  3.3V  [SOT23-5]  22.61,100.33 0 top
U42  CY7C65213  [SSOP28DB]  34.04,100.33 0 top
U43  3.3V  [SOT23-5]  66.8,100.33 0 top
U44  CY7C65213  [SSOP28DB]  78.23,100.33 0 top
U45  3.3V  [SOT23-5]  111,100.33 0 top
U46  CY7C65213  [SSOP28DB]  122.43,100.33 0 top
U47  3.3V  [SOT23-5]  155.19,100.33 0 top
U48  CY7C65213  [SSOP28DB]  166.62,100.33 0 top
U49  3.3V  [SOT23-5]  199.39,100.33 0 top
U50  CY7C65213  [SSOP28DB]  210.82,100.33 0 top

## Library data of the parts
C1 C9 C17 C25 C33 C41 C49 C57 C65 C73 C81 C89 C97 C105 C113 C121 C129 C137 C145 C153 C161 C169 C177 C185 C193 = SparkFun-Capacitors; PROD_ID: CAP-07888
C2 C10 C18 C26 C34 C42 C50 C58 C66 C74 C82 C90 C98 C106 C114 C122 C130 C138 C146 C154 C162 C170 C178 C186 C194 = SparkFun-Capacitors; PROD_ID: CAP-00868
C3 C5 C11 C13 C19 C21 C27 C29 C35 C37 C43 C45 C51 C53 C59 C61 C67 C69 C75 C77 C83 C85 C91 C93 C99 C101 C107 C109 C115 C117 C123 C125 C131 C133 C139 C141 C147 C149 C155 C157 C163 C165 C171 C173 C179 C181 C187 C189 C195 C197 = SparkFun-Capacitors; PROD_ID: CAP-08604
C4 C6 C12 C14 C20 C22 C28 C30 C36 C38 C44 C46 C52 C54 C60 C62 C68 C70 C76 C78 C84 C86 C92 C94 C100 C102 C108 C110 C116 C118 C124 C126 C132 C134 C140 C142 C148 C150 C156 C158 C164 C166 C172 C174 C180 C182 C188 C190 C196 C198 = SparkFun-Capacitors; PROD_ID: CAP-10300
C7 C8 C15 C16 C23 C24 C31 C32 C39 C40 C47 C48 C55 C56 C63 C64 C71 C72 C79 C80 C87 C88 C95 C96 C103 C104 C111 C112 C119 C120 C127 C128 C135 C136 C143 C144 C151 C152 C159 C160 C167 C168 C175 C176 C183 C184 C191 C192 C199 C200 = SparkFun-Capacitors; PROD_ID: CAP-11812
D1 D6 D11 D16 D21 D26 D31 D36 D41 D46 D51 D56 D61 D66 D71 D76 D81 D86 D91 D96 D101 D106 D111 D116 D121 = SparkFun-LED; PROD_ID: DIO-00819
D2 D7 D12 D17 D22 D27 D32 D37 D42 D47 D52 D57 D62 D67 D72 D77 D82 D87 D92 D97 D102 D107 D112 D117 D122 = SparkFun-LED; PROD_ID: DIO-00821
D3 D5 D8 D10 D13 D15 D18 D20 D23 D25 D28 D30 D33 D35 D38 D40 D43 D45 D48 D50 D53 D55 D58 D60 D63 D65 D68 D70 D73 D75 D78 D80 D83 D85 D88 D90 D93 D95 D98 D100 D103 D105 D108 D110 D113 D115 D118 D120 D123 D125 = SparkFun-DiscreteSemi; PROD_ID: DIO-10955
D4 D9 D14 D19 D24 D29 D34 D39 D44 D49 D54 D59 D64 D69 D74 D79 D84 D89 D94 D99 D104 D109 D114 D119 D124 = SparkFun-DiscreteSemi; PROD_ID: DIO-12442
E$1 = SparkFun-Retired
E$7 E$8 FD1-FD50 LOGO1-LOGO75 = SparkFun-Aesthetics
J1 J6 J11 J16 J21 J26 J31 J36 J41 J46 J51 J56 J61 J66 J71 J76 J81 J86 J91 J96 J101 J106 J111 J116 J121 = SparkFun-Connectors; PROD_ID: CONN-11752
J2-J5 J7-J10 J12-J15 J17-J20 J22-J25 J27-J30 J32-J35 J37-J40 J42-J45 J47-J50 J52-J55 J57-J60 J62-J65 J67-J70 J72-J75 J77-J80 J82-J85 J87-J90 J92-J95 J97-J100 J102-J105 J107-J110 J112-J115 J117-J120 J122-J125 = SparkFun-Connectors
JP1-JP50 = SparkFun-Passives
R1 R2 R7 R10 R13 R16 R19 R22 R25 R28 R31 R34 R37 R40 R43 R46 R49 R52 R55 R58 R61 R64 R67 R70 R73 = SparkFun-Resistors; PROD_ID: RES-08787
R3-R6 R8 R9 R11 R12 R14 R15 R17 R18 R20 R21 R23 R24 R26 R27 R29 R30 R32 R33 R35 R36 R38 R39 R41 R42 R44 R45 R47 R48 R50 R51 R53 R54 R56 R57 R59 R60 R62 R63 R65 R66 R68 R69 R71 R72 R74 R75 = SparkFun-Resistors; PROD_ID: RES-07856
U1 U4 U6 U8 U10 U12 U14 U16 U18 U20 U22 U24 U26 U28 U30 U32 U34 U36 U38 U40 U42 U44 U46 U48 U50 = SparkFun-DigitalIC; PROD_ID: IC-12487
U2 U3 U5 U7 U9 U11 U13 U15 U17 U19 U21 U23 U25 U27 U29 U31 U33 U35 U37 U39 U41 U43 U45 U47 U49 = SparkFun-PowerIC; PROD_ID: VREG-12457